# Altium PCB nail_detector.PcbDoc
Units mm, origin at the board's own origin, x right, y up, seen from the top; angles counter-clockwise.
Board outline 180 x 100 mm, 2 copper layers (Top Layer, Bottom Layer); 116 components, 102 nets, 420 pads, 177 vias.
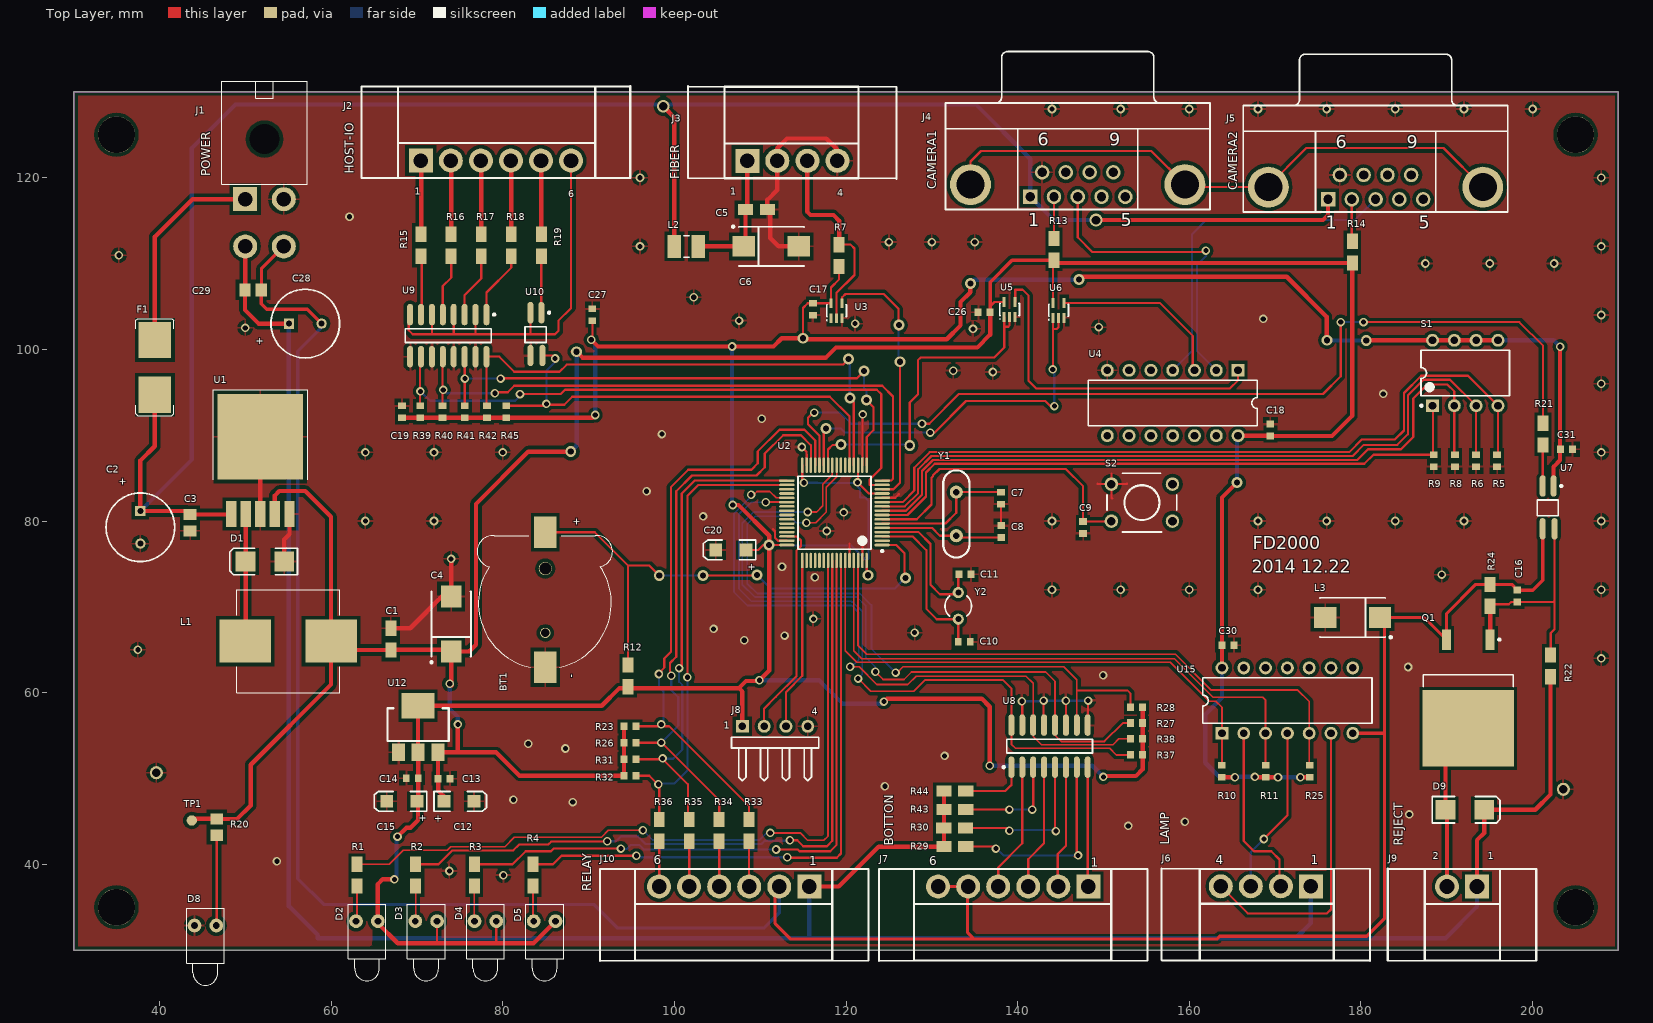
[diagram p0: Top Layer view]
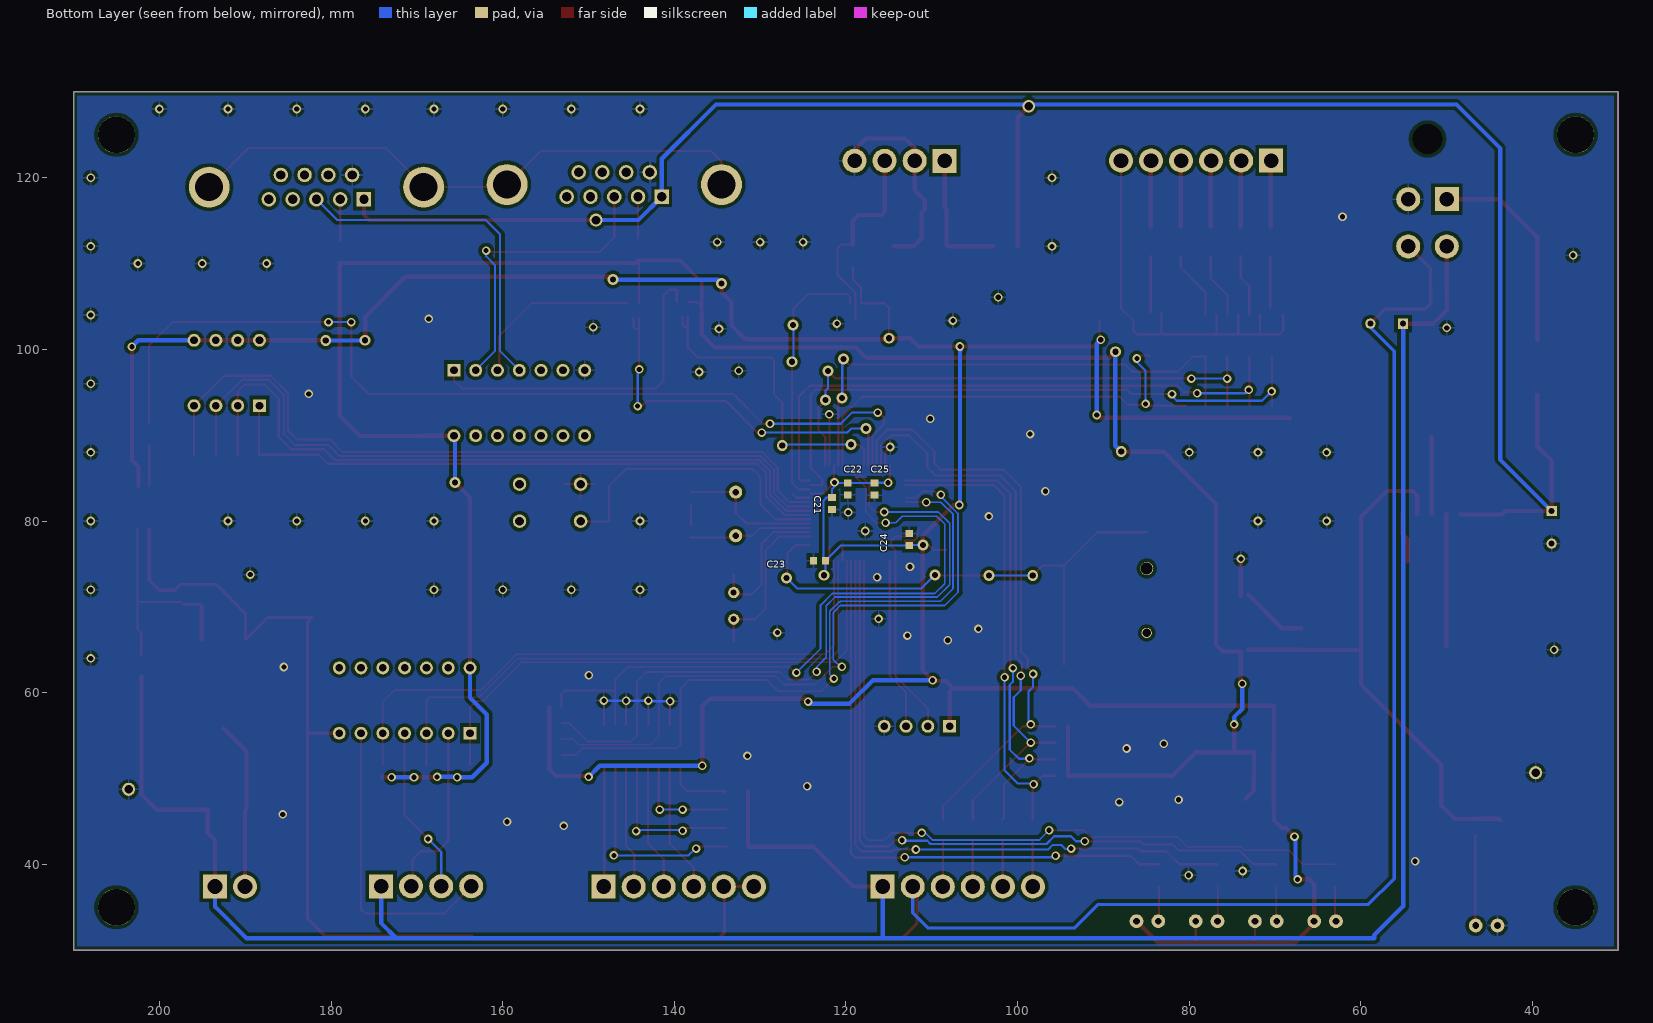
[diagram p1: Bottom Layer view, seen from below]

## Layer stack, top to bottom
Top Layer: signal copper 0.0356
Dielectric: dielectric 0.32, FR-4, Dk 4.8
Bottom Layer: signal copper 0.0356

## Board outline
30,130 210,130 210,30 30,30

## Design rules (kind name [scope] priority, off if disabled: settings)
Clearance Clearance_u2 [InComponent('U2')] p1 off: gap=0.2
Clearance Clearance_all [All] p2: gap=0.2
Clearance ploy [All] p3 off: gap=0.4
ComponentClearance [All] p1: gap=0.1 collisioncheckmode=3 verticalgap=0.254 showdistances=FALSE
HoleSize [All] p1: absolutevalues=TRUE maxlimit=5 minlimit=0.025 maxpercent=80.000 minpercent=20.000
MinimumSolderMaskSliver [All] p1 off: minsoldermaskwidth=0.254
PolygonConnect [All] p1: connectstyle=Relief reliefconductorwidth=0.254 reliefentries=4 polygonreliefangle="90 Angle"
RoutingVias [All] p1: holewidth=0.6 width=1 viastyle="Through Hole" minholewidth=0.4 minwidth=1 maxholewidth=0.711 maxwidth=1.27
SilkToSilkClearance [All] p1 off: silktosilkclearance=0.1
SilkscreenOverComponentPads [All] p1 off: minsilkscreentomaskgap=0
SolderMaskExpansion [All] p1: expansion=0.102
Width [All] p1: maxlimit=1 minlimit=0.2 preferedwidth=0.254 minimp=50.000000 maximp=50.000000 favimp=50.000000
23 further rules are at their usual default settings.

## Components (designator, comment, footprint, x,y, rotation, side; value= is the part's Value field where it differs from the comment)
BT1 "Battery" CR1220 84.963,70.46 r90 top
C1 "100nF" 0805 66.974,64.974 r90 top
C2 "35V220uF" RB8-12 37.79,79.273 r90 top
C3 "100nF" 6-0805 43.581,79.807 r270 top
C4 "Cap Pol3" 7343 74,68 r90 top
C5 "100nF" 0805 108.3,116.3 r0 top
C6 "Cap Pol3" 7343 111.3,112 r0 top
C7 "Cap" 1608[0603] 138.057,82.655 r90 top
C8 "Cap" 1608[0603] 138.083,78.769 r270 top
C9 "Cap" 1608[0603] 147.625,79.248 r90 top
C10 "Cap" 1608[0603] 133.782,65.938 r180 top
C11 "Cap" 1608[0603] 133.883,73.787 r180 top
C12 "Cap Pol3" 3216-18 74.905,47.346 r0 top
C13 "Cap Semi" 1608[0603] 73.177,49.987 r180 top
C14 "Cap Semi" 1608[0603] 69.469,50.038 r0 top
C15 "Cap Pol3" 3216-18 68.25,47.346 r180 top
C16 "Cap" 1608[0603] 198.222,71.247 r270 top
C17 "Cap Semi" 1608[0603] 116.154,104.673 r90 top
C18 "Cap Semi" 1608[0603] 169.443,90.602 r270 top
C19 "Cap Semi" 1608[0603] 68.275,92.735 r270 top
C20 "Cap Pol3" 3216-18 106.578,76.632 r180 top
C21 "Cap Semi" 1608[0603] 121.641,82.042 r90 bottom
C22 "Cap Semi" 1608[0603] 119.786,83.744 r90 bottom
C23 "Cap Semi" 1608[0603] 123.088,75.387 r180 bottom
C24 "Cap Semi" 1608[0603] 112.624,77.851 r270 bottom
C25 "Cap Semi" 1608[0603] 116.688,83.718 r90 bottom
C26 "Cap Semi" 1608[0603] 136.093,104.318 r0 top
C27 "Cap Semi" 1608[0603] 90.449,104.038 r270 top
C28 "35V220uF" RB8-12 57,103 r180 top
C29 "100nF" 6-0805 50.927,106.934 r0 top
C30 "Cap Semi" 1608[0603] 164.516,65.532 r180 top
C31 "Cap Semi" 1608[0603] 203.962,88.367 r180 top
D1 "SS24" SMB 52.293,75.286 r180 top
D2 "" LED-1 64.186,33.376 r270 top
D3 "" LED-1 71.086,33.376 r270 top
D4 "" LED-1 77.986,33.376 r270 top
D5 "" LED-1 84.887,33.376 r270 top
D8 "" LED-1 45.364,32.868 r270 top
D9 "SS24" SMB 192.1,46.355 r0 top
F1 "LITTLEFUSE154-002" LTFS154 39.472,101.092 r270 top
J1 "Header 4H" 5569-4A 50,117.5 r180 top
J2 "" 3500-6 70.46,121.996 r0 top
J3 "Header 4" 3500-4 108.5,121.971 r0 top
J4 "D Connector 9" DSUB1.385-2H9 147,128.7 r0 top
J5 "D Connector 9" DSUB1.385-2H9 181.7,128.4 r0 top
J6 "Header 4" 3500-4 174.168,37.44 r180 top
J7 "" 3500-6 148.234,37.414 r180 top
J8 "Header 4" HDR1X4H 107.925,56.083 r0 top
J9 "Header 2" 3500-2 193.523,37.414 r180 top
J10 "" 3500-6 115.722,37.414 r180 top
L1 "33uH/2.1A" CDRH1205 55,66 r90 top
L2 "Inductor" 3225[1210] 101.397,111.989 r180 top
L3 "33uH/2.1A" 7343 179.019,68.758 r180 top
Q1 "IRF530NS" D2PAK_N 192.507,59.385 r270 top
R1 "Res Semi" 0805 63.017,40.005 r270 top
R2 "Res Semi" 0805 69.858,40.005 r270 top
R3 "Res Semi" 0805 76.7,40.005 r270 top
R4 "Res Semi" 0805 83.541,40.005 r270 top
R5 "Res Semi" 1608[0603] 195.859,87.02 r90 top
R6 "Res Semi" 1608[0603] 193.404,87.02 r90 top
R7 "Res2" 0805 119.2,112.2 r270 top
R8 "Res Semi" 1608[0603] 190.949,87.02 r90 top
R9 "Res Semi" 1608[0603] 188.493,87.02 r90 top
R10 "Res Semi" 1608[0603] 163.779,50.851 r270 top
R11 "Res Semi" 1608[0603] 168.91,50.851 r270 top
R12 "Res2" 0805 94.615,60.681 r90 top
R13 "Res2" 0805 144.247,112.928 r270 top
R14 "Res2" 0805 178.994,112.598 r270 top
R15 "Res Semi" 0805 70.5,113.4 r270 top
R16 "Res Semi" 0805 74,113.4 r270 top
R17 "Res Semi" 0805 77.5,113.4 r270 top
R18 "Res Semi" 0805 81,113.4 r270 top
R19 "Res Semi" 0805 84.5,113.4 r270 top
R20 "Res Semi" 2012[0805] 46.685,44.348 r90 top
R21 "Res Semi" 0805 201.219,91.389 r270 top
R22 "Res Semi" 0805 202.082,61.849 r90 top
R23 "Res Semi" 1608[0603] 94.844,56.083 r180 top
R24 "Res Semi" 0805 195.047,70.068 r90 top
R25 "Res Semi" 1608[0603] 174.041,50.851 r270 top
R26 "Res Semi" 1608[0603] 94.844,54.161 r180 top
R27 "Res Semi" 1608[0603] 153.859,56.456 r0 top
R28 "Res Semi" 1608[0603] 153.859,58.293 r0 top
R29 "Res Semi" 0805 133.96,42.062 r180 top
R30 "Res Semi" 0805 133.934,44.221 r180 top
R31 "Res Semi" 1608[0603] 94.844,52.239 r180 top
R32 "Res Semi" 1608[0603] 94.844,50.317 r180 top
R33 "Res Semi" 0805 108.712,42.697 r90 top
R34 "Res Semi" 0805 105.224,42.697 r90 top
R35 "Res Semi" 0805 101.735,42.697 r90 top
R36 "Res Semi" 0805 98.247,42.697 r90 top
R37 "Res Semi" 1608[0603] 153.859,52.781 r0 top
R38 "Res Semi" 1608[0603] 153.859,54.618 r0 top
R39 "Res Semi" 1608[0603] 70.383,92.735 r270 top
R40 "Res Semi" 1608[0603] 72.983,92.735 r270 top
R41 "Res Semi" 1608[0603] 75.582,92.735 r270 top
R42 "Res Semi" 1608[0603] 78.181,92.735 r270 top
R43 "Res Semi" 0805 133.96,46.38 r180 top
R44 "Res Semi" 0805 133.96,48.539 r180 top
R45 "Res Semi" 1608[0603] 80.416,92.735 r270 top
S1 "SW-DIP4" DIP-8 192.147,97.245 r90 top
S2 "SW-PB" BUTTON6*6*6 150.927,84.303 r0 top
TP1 "TP" TP1 43.764,45.11 r90 top
U1 "LM2596S-5.0" TO-263 51.76,89.814 r0 top
U2 "STM32F103R6T6" LQFP64_N 118.658,80.953 r180 top
U3 "NC7SZ14P5X" SC70-5 118.9,104.5 r0 top
U4 "SN7407N" N014 158.064,93.751 r180 top
U5 "NC7S08" SC70-5 139.064,104.645 r0 top
U6 "NC7S08" SC70-5 144.764,104.545 r0 top
U7 "ps2801-1" SO-4_M 202.438,83.922 r270 top
U8 "ps2801-4" SO-16_M 143.713,53.772 r90 top
U9 "ps2801-4" SO-16_M 73.66,101.6 r270 top
U10 "ps2801-1" SO-4_M 84.506,104.115 r270 top
U12 "AS1117M3-33" SOT-223/P2.3 67.836,53.01 r0 top
U15 "SN7407N" N014 171.425,59.08 r0 top
Y1 "XTAL" XTAL-A 132.85,78.286 r90 top
Y2 "XTAL" R38 133.079,70.108 r0 top

## Footprints (in the part's own frame and the unit in brackets; to place one, negate y for a bottom-side part, rotate by r counter-clockwise, add the part's x,y. Pads: shape width x height; smd on the part's side, far side on the other; paste and mask are expansions set on the pad)
6-0805 [mm] "Chip Resistor; Body 2.0 x 1.3 mm (LxW typ)"
  rect 1.3x1.5 smd: 1(-0.95,0) 2(0.95,0)
0805 [mil]
  rect 70x50 smd: 1(0,0) 2(100,0)
1608[0603] [mm] "Chip Capacitor, Body 1.6x0.8mm, IPC High Density"
  rect 0.8x0.9 smd: 1(-0.7,0) 2(0.7,0)
  body extent -0.87,-0.48 0.87,0.48, height 1.3
2012[0805] [mm] "Chip Resistor; Body 2.0 x 1.3 mm (LxW typ)"
  rect 1.3x1.5 smd: 1(-0.95,0) 2(0.95,0)
3216-18 [mm]
  rect 1.5x1.5 smd: 1(-1.75,0) 2(1.75,0)
  silkscreen extent -2.9,-1.15 3.2,1.15, body extent -1.63,-0.8 1.57,0.8, height 1.6
3225[1210] [mm] "Chip Resistor; Body 3.2 x 2.5 mm (LxW typ)"
  rect 1.6x2.7 smd: 1(-1.4,0) 2(1.4,0)
  silkscreen extent -0.3,-1.25 0.3,1.25
3500-2 [mil]
  rect 110x110 hole 66.93: 1(0,0)
  round 110 hole 66.93: 2(137.8,0)
  silkscreen extent -272,-82 409,340, body extent -272,-80 409,341, height 315
3500-4 [mil]
  rect 110x110 hole 66.93: 1(0,0)
  round 110 hole 66.93: 2(137.79,0) 3(275.59,0) 4(413.39,0)
  silkscreen extent -272,-82 685,342, body extent -272,-80 685,331, height 315
3500-6 [mil]
  rect 110x110 hole 66.93: 1(0,0)
  round 110 hole 66.93: 2(137.8,0) 3(275.59,0) 4(413.39,0) 5(551.18,0) 6(688.98,0)
  silkscreen extent -272,-80 961,341, body extent -272,-80 961,330, height 315
5569-4A [mil] "MOLEX 5569-4A"
  round 60 hole 137.8 unplated: 0(-88.58,-275.59)
  rect 110x110 hole 66.93: 1(0,0)
  round 110 hole 66.93: 2(-177.17,0) 3(0,216.54) 4(-177.17,216.54)
  silkscreen extent -285,-541 108,-69
7343 [mm] "Capacitor, SM Tantalum; Body 7.3 x 4.3 mm (LxW typ)"
  rect 2.6x2.4 smd: 1(-3.2,0) 2(3.2,0)
  silkscreen extent -4.57,-2.3 3.8,2.42
BUTTON6*6*6 [mil]
  round 62 hole 39.37: 1(0,0) 2(0,-170) 3(280,-170) 4(280,0)
  silkscreen extent -20,-220 300,50, body extent -13,-208 299,36, height 276
CDRH1205 [mm]
  rect 5x6 smd: 1(0,5) 2(0,-5)
  silkscreen extent -6,-6 6,6, body extent -6.02,-5.94 5.93,6.03, height 6
CR1220 [mm] "battery cr1220"
  round 1.2 hole 1: 0(-3.5,0)
  round 1.524 hole 1.4: 0(4,0)
  rect 3.7x2.6 smd: 1(8.23,0) 2(-7.5,0)
  silkscreen extent -7.51,-7.83 7.83,7.93
D2PAK_N [mm] "D2-PAK, 4-Leads, Body 8.8x10.4mm, Pitch 2.54mm, Lead Span 15.1mm, IPC Medium Density"
  rect 2.4x1.05 smd: 1(-6.8,2.54) 3(-6.8,-2.54)
  rect 8.9x10.65 smd: 2(3.55,0)
  silkscreen extent -6.92,-5.25 -1.3,5.25, body extent -2.7,-5.28 6.3,5.28, height 4.69
DIP-8 [mm] "DIP; 8 Leads; Row Spacing 7.62 mm; Pitch 2.54 mm"
  rect 1.5x1.5 hole 0.9: 1(-3.81,3.81)
  round 1.5 hole 0.9: 2(-3.81,1.27) 3(-3.81,-1.27) 4(-3.81,-3.81) 5(3.81,-3.81) 6(3.81,-1.27) 7(3.81,1.27) 8(3.81,3.81)
  silkscreen extent -3.93,-5.15 2.65,5.23, body extent -3.6,-5.15 3.6,5.15, height 5.08
DSUB1.385-2H9 [mm] "Connector; D Subminiature; 9 Position; Right Angle; Pitch 1.385 mm"
  rect 1.69x1.69 hole 1.09: 1(-5.54,-10.92)
  round 1.69 hole 1.09: 2(-2.77,-10.92) 3(0,-10.92) 4(2.77,-10.92) 5(5.54,-10.92) 6(-4.155,-8.08) 7(-1.385,-8.08) 8(1.385,-8.08) 9(4.155,-8.08)
  round 4.76 hole 3.26: 10(-12.495,-9.5) 11(12.495,-9.5)
  silkscreen extent -15.4,-12.4 15.4,6
HDR1X4H [mm] "Connector; Header; 4 Position; Right Angle"
  rect 1.5x1.5 hole 0.9: 1(0,0)
  round 1.5 hole 0.9: 2(2.54,0) 3(5.08,0) 4(7.62,0)
  silkscreen extent -1.27,-6.35 8.89,-1.27
LED-1 [mm] "LED; 2 Leads"
  round 1.6 hole 0.8: 1(0,1.27) 2(0,-1.27)
  silkscreen extent -2,-2.2 6.95,2.2
LQFP64_N [mm] "Thin QFP, 64-Leads, Body 10x10mm, Pitch 0.5mm, IPC Medium Density"
  oval 1.8x0.3 smd: 1(-5.55,3.75) 2(-5.55,3.25) 3(-5.55,2.75) 4(-5.55,2.25) 5(-5.55,1.75) 6(-5.55,1.25) 7(-5.55,0.75) 8(-5.55,0.25) 9(-5.55,-0.25) 10(-5.55,-0.75) 11(-5.55,-1.25) 12(-5.55,-1.75) 13(-5.55,-2.25) 14(-5.55,-2.75) 15(-5.55,-3.25) 16(-5.55,-3.75) 33(5.55,-3.75) 34(5.55,-3.25) 35(5.55,-2.75) 36(5.55,-2.25) 37(5.55,-1.75) 38(5.55,-1.25) 39(5.55,-0.75) 40(5.55,-0.25) 41(5.55,0.25) 42(5.55,0.75) 43(5.55,1.25) 44(5.55,1.75) 45(5.55,2.25) 46(5.55,2.75) 47(5.55,3.25) 48(5.55,3.75)
  oval 0.3x1.8 smd: 17(-3.75,-5.55) 18(-3.25,-5.55) 19(-2.75,-5.55) 20(-2.25,-5.55) 21(-1.75,-5.55) 22(-1.25,-5.55) 23(-0.75,-5.55) 24(-0.25,-5.55) 25(0.25,-5.55) 26(0.75,-5.55) 27(1.25,-5.55) 28(1.75,-5.55) 29(2.25,-5.55) 30(2.75,-5.55) 31(3.25,-5.55) 32(3.75,-5.55) 49(3.75,5.55) 50(3.25,5.55) 51(2.75,5.55) 52(2.25,5.55) 53(1.75,5.55) 54(1.25,5.55) 55(0.75,5.55) 56(0.25,5.55) 57(-0.25,5.55) 58(-0.75,5.55) 59(-1.25,5.55) 60(-1.75,5.55) 61(-2.25,5.55) 62(-2.75,5.55) 63(-3.25,5.55) 64(-3.75,5.55)
  silkscreen extent -5.68,-4.25 4.25,4.57, body extent -5,-5 5,5, height 1.6
LTFS154 [mm] "little fuse 154"
  rect 4.24x3.81 smd: 1(0,0) 2(6.37,0)
  silkscreen extent -2.5,-2.2 8.8,2.2
N014 [mm] "DIP; 14 Leads; Row Spacing 7.62 mm; Pitch 2.54 mm"
  rect 1.5x1.5 hole 0.9: 1(-7.62,-3.81)
  round 1.5 hole 0.9: 2(-5.08,-3.81) 3(-2.54,-3.81) 4(0,-3.81) 5(2.54,-3.81) 6(5.08,-3.81) 7(7.62,-3.81) 8(7.62,3.81) 9(5.08,3.81) 10(2.54,3.81) 11(0,3.81) 12(-2.54,3.81) 13(-5.08,3.81) 14(-7.62,3.81)
  silkscreen extent -9.85,-2.65 9.85,2.65
R38 [mm] "Crystal, Thru-Hole; 2 Leads; Body 3.1 x 8.2 mm (Dia.xH)"
  round 1.3 hole 0.7: 1(0,1.55) 2(0,-1.55)
  silkscreen extent -1.55,-1.19 1.55,1.17
RB8-12 [mm] "Polarized Capacitor (Radial); 2 Leads,D=8,H=12"
  rect 1.2x1.2 hole 0.7: 1(1.905,0)
  round 1.2 hole 0.7: 2(-1.905,0)
  silkscreen extent -4,-4 4,4, body extent -3.9,-3.94 4.06,4.05, height 8
SC70-5 [mm] "SOT-353/SC-88A; 5 Leads; Body 2.2 x 2.4 mm, inc. leads (LxW max)"
  rect 0.35x1.15 smd: 1(-0.65,-0.875) 2(0,-0.875) 3(0.65,-0.875) 4(0.65,0.875) 5(-0.65,0.875)
  silkscreen extent -1.17,-1.15 1.15,0.7, body extent -1,-1.1 1,1.1, height 0.49
SMB [mm] "DO-214-AA/SMB; 2 C-Bend Leads; Body 5.3 x 3.6 mm, inc. leads (LxW)"
  rect 2.3x2.3 smd: 1(-2.25,0) 2(2.25,0)
  silkscreen extent -3.8,-1.55 4.1,1.55
SO-4_M [mm] "SOIC, 16-Leads, Body 9.9x3.9mm, Pitch 1.27mm, IPC Low Density"
  oval 2.5x0.7 smd: 1(-0.164,0) 2(-0.164,-1.27) 3(4.826,-1.27) 4(4.826,0.127)
  silkscreen extent -0.29,-1.9 3.3,1.03
SO-16_M [mm] "SOIC, 16-Leads, Body 9.9x3.9mm, Pitch 1.27mm, IPC Low Density"
  oval 2.5x0.7 smd: 1(-2.45,4.445) 2(-2.45,3.175) 3(-2.45,1.905) 4(-2.45,0.635) 5(-2.45,-0.635) 6(-2.45,-1.905) 7(-2.45,-3.175) 8(-2.45,-4.445) 9(2.45,-4.445) 10(2.45,-3.175) 11(2.45,-1.905) 12(2.45,-0.635) 13(2.45,0.635) 14(2.45,1.905) 15(2.45,3.175) 16(2.45,4.445)
  silkscreen extent -2.57,-5 0.8,5.47, body extent -2,-5 2,5, height 1.75
SOT-223/P2.3 [mil]
  rect 59x79 smd: 1(0.61,1.72) 2(91.16,1.72) 3(181.71,1.72)
  rect 150x119 smd: 4(90.49,215.26)
  silkscreen extent -49,54 231,204
TO-263 [mm]
  rect 1.2x3 smd: 1(-3.4,-9) 2(-1.7,-9) 3(0,-9) 4(1.7,-9) 5(3.4,-9)
  rect 10x10 smd: 6(0,0)
  silkscreen extent -5.5,-5.02 5.5,5.5, body extent -5.49,-5.84 5.31,5.21, height 4
TP1 [mm]
  round 1.2 smd: 1(0,-0.02)
XTAL-A [mil]
  round 60 hole 30: 1(0,0) 2(200,0)
  silkscreen extent -100,-60 300,60, body extent -115,-95 325,89, height 143

## Part data
BT1: "Multicell Battery"
C1 C3 C5 C29: library part CAP
C2 C28: library part "CAPACITOR POL", "Polarized Capacitor (Radial); 35V;220uF;D=8,H=12"
C4 C6: "Polarized Capacitor (Surface Mount);220uF;16V;7343"
C7 C8 C9 C10 C11 C16: "Capacitor"
C12 C15 C20: "Polarized Capacitor (Surface Mount)"
C13 C14 C17 C18 C19 C21 C22 C23 C24 C25 C26 C27 C30 C31: "Capacitor (Semiconductor SIM Model)"
D1 D9: library part "D Schottky", "Schottky Diode; SS24; 40V;2A;SMB"
D2 D3 D4 D5 D8: library part LED1, "Typical RED GaAs LED"
F1: library part "Fuse 1", "Fuse"
J1: "Header, 4-Pin, Right Angle"
J2 J7 J10: library part "Header 6", "Header, 6-Pin"
J3 J6 J8: "Header, 4-Pin"
J4 J5: "Receptacle Assembly, 9 Position, Right Angle"
J9: "Header, 2-Pin"
L1 L3: library part L, "CDRH1205-330M；大功率屏蔽贴片"
Q1: "HEXFET Power MOSFET"
R1 R2 R3 R4 R5 R6 R8 R9 R10 R11 R15 R16 R17 R18 R19 R20 R21 R22 R23 R24 R25 R26 R27 R28 R29 R30 R31 R32 R33 R34 R35 R36 R37 R38 R39 R40 R41 R42 R43 R44 R45: "Semiconductor Resistor"
R7 R12 R13 R14: "Resistor"
S1: "DIP Switch"
S2: "Switch"
TP1: "Test Point"
U1: "Buck regulator; 5.0V;3A; TO-263;TI"
U2: "STM32 ARM-based 32-bit MCU with 32 Kbytes Flash, 64-pin LQFP, Industrial Temperature"
U3: library part NC7SZ14
U4 U15: "Hex Buffer / Driver with Open-Collector High-Voltage Outputs"
U12: library part AS1117-50
Y1 Y2: "Crystal Oscillator"

## Free pads (board coordinates)
  round 4.3 hole 4.3 unplated: 0(35,125) 1(35,35) 2(205,35) 3(205,125)
  round 1.524 hole 1: 0(39.649,50.673) 1(203.581,48.743)

## Via types
v1: diameter 1, hole 0.6, Top Layer to Bottom Layer, 152 vias
v2: diameter 1.27, hole 0.711, Top Layer to Bottom Layer, 23 vias
v3: diameter 1.5, hole 1, Top Layer to Bottom Layer, 2 vias

## Nets (pads, with @x,y where several pads share a name; then routed paths per layer and width w, separated by ;. In a path a pad name is that pad's centre, name@x,y a point inside that pad or via, vN(x,y) a via of type N, cw(c..) or ccw(c..) an arc to the next point about the centre after c; other vN are vias at no path point)
24GND: C16.1 C28.2 C29.2 J1.4 J7.5 J7.6 J10.2 L3.1 Q1.3 R24.2 U7.3 U15.7 | length 301.3
  Top Layer w0.381: J1.4 51.892,109.392 51.892,106.949 C29.2 51.877,105.324 52.527,104.673 57.232,104.673 C28.2 ; J10.2 111.735,36.926 111.735,33.096 113.538,31.293 134.925,31.293 ; J7.6 J7.5 134.163,37.343 134.163,32.055 134.925,31.293 ; U15.7 182.575,55.27 182.753,55.093 ; U7.3 201.168,73.101 200.014,71.947 C16.1 197.561,72.608 R24.2 193.385,72.608 189.967,69.19 Q1.3 187.394,68.758 L3.1 182.753,68.224 182.753,55.093 ; 134.925,31.293 163.22,31.293 163.551,31.623 180.67,31.623 182.753,33.706 182.753,55.093
  Bottom Layer w0.381: C28.2 58.905,102.568 56.134,99.797 56.134,38.329 59.131,35.331 90.602,35.331 93.345,32.588 110.465,32.588 112.222,34.346 J10.2
+3.3V: C14.2 C15.1 C17.2 C19.2 C20.1 C21.2 C22.2 C23.2 C24.2 C25.2 C27.2 C31.2 D2.1 D3.1 D4.1 D5.1 J8.1 R7.2 R12.1 R27.2 R28.2 R37.2 R38.2 R39.2 R40.2 R41.2 R42.2 R45.2 S1.5 S1.6 S1.7 S1.8 U2.13 U2.19 U2.32 U2.48 U2.64 U3.5 U7.1 U12.2 U12.4 | length 435.2
  Top Layer w0.254: 72.356,31.115 D3.1 ; 79.256,30.912 D4.1 ; v1@90.449,100.99 C27.2 ; C20.1 109.779,76.632 110.363,77.216 v2(111.049,77.216) 111.061,77.203 U2.48 ; U2.32 114.908,84.634 v1(115.087,84.455) ; v2@114.986,101.194 v2(114.986,101.295) 114.986,104.826 115.533,105.373 C17.2 U3.5@118.248,105.373 ; U3.5 118.25,107.201 119.2,108.151 R7.2 ; U2.19 121.408,84.578 v1(121.336,84.506) 122.638,83.203 U2.13 ; U2.64 122.408,73.832 v2(122.555,73.685)
  Top Layer w0.5: v1(67.386,38.252) 66.015,38.252 65.456,37.694 D2.1 65.456,33.122 67.767,30.81 83.591,30.81 D5.1 ; v1(67.742,43.231) 68.783,44.272 69.263,44.272 70.127,45.136 70.127,46.99 70.169,47.032 C14.2 70.169,53.037 U12.2 70.135,53.071 U12.4 91.549,58.478 93.599,60.528 107.518,60.528 ; C19.2 R39.2 R40.2 R41.2 R42.2 R45.2@80.34,92.035 ; R45.2 90.461,92.035 v1(90.78,92.354) ; v1(90.322,101.117) 90.449,100.99 91.11,100.33 v1(106.731,100.33) 111.557,100.33 112.522,101.295 v2(114.986,101.295) 115.106,101.175 131.732,101.175 133.35,102.794 133.35,105.512 134.493,106.655 v2(134.493,107.671) ; v1(106.807,81.864) 107.467,81.864 111.049,78.283 v2(111.049,77.216) 111.049,62.586 v1(109.906,61.443) 110.211,61.443 110.134,61.366 108.356,61.366 107.518,60.528 ; J8.1 107.925,60.122 107.518,60.528 ; v1(124.409,58.953) 124.765,59.309 135.814,59.309 136.754,58.369 v1(136.754,51.486) ; v2(147.142,108.153) 147.447,108.458 171.348,108.458 176.022,103.784 v2(176.022,101.067) ; v1(149.987,50.19) 150.089,50.292 153.772,50.292 154.559,51.079 R37.2 R38.2 R27.2 R28.2 ; v2(180.619,101.041) 180.633,101.055 S1.8 S1.7 S1.6 S1.5 ; U7.1 202.438,86.309 203.2,87.071 v1(203.2,100.305)
  Bottom Layer w0.254: v2(111.049,77.216) 112.559,77.216 C24.2 120.625,77.151 C23.2 ; v1(115.087,84.455) C25.2@116.651,84.455 ; C25.2 C22.2@119.761,84.418 ; C22.2 v1@121.274,84.444 ; v1(121.336,84.506) 121.336,84.023 121.641,83.718 C21.2 122.261,82.742 122.606,82.398 122.606,75.605 C23.2 ; v2(122.555,73.685) 122.388,73.852 C23.2
  Bottom Layer w0.5: v1(67.386,38.252) 67.64,38.506 67.64,43.129 v1(67.742,43.231) ; v1(90.322,101.117) 90.78,100.66 v1(90.78,92.354) ; v1@106.604,99.949 106.604,99.924 106.716,99.811 106.716,81.955 v1(106.807,81.864) ; v1(109.906,61.443) 116.865,61.443 119.583,58.725 124.181,58.725 v1(124.409,58.953) ; v2(134.493,107.671) 134.925,108.102 147.091,108.102 v2(147.142,108.153) ; v1(136.754,51.486) 148.692,51.486 v1(149.987,50.19) ; v2(176.022,101.067) 176.047,101.041 v2(180.619,101.041) ; S1.5 202.45,101.055 v1(203.2,100.305)
+5V: C1.1 C4.1 C12.1 C13.2 C18.2 C26.2 C30.2 L1.2 R10.2 R11.2 R13.2 R14.2 R20.2 R23.2 R25.2 R26.2 R31.2 R32.2 TP1.1 U1.4 U4.14 U5.5 U6.5 U12.3 U15.14 | length 356.2
  Top Layer w0.254: 136.793,102.325 136.855,102.387 136.855,105.063 137.312,105.52 U5.5 ; U6.5 144.114,110.255 R13.2
  Top Layer w0.3: v2@88.062,99.72 v2(88.621,99.72)
  Top Layer w0.4: C26.2 136.793,107.837 139.344,110.388 R13.2
  Top Layer w0.5: TP1.1@43.764,45.11 43.952,45.298 R20.2 ; R20.2@46.05,45.273 49.058,45.273 50.648,46.863 50.648,51.613 60,60.965 L1.2 59.985,65.985 59.985,80.496 56.992,83.49 53.969,83.49 53.46,82.98 U1.4 ; L1.2@60.468,64.974 C1.1 67,65 C4.1@73.121,65 ; C12.1@73.453,47.644 72.477,48.619 C13.2 72.452,50.013 U12.3 74.6,53.054 ; v1(73.838,61.036) 74.016,60.858 74.092,60.858 74,60.95 C4.1 76.179,64.8 76.179,64.876 76.886,65.583 76.886,81.991 82.982,88.087 v2(87.935,88.087) ; v1(74.778,56.312) 74.778,53.232 74.6,53.054 ; v2(88.621,99.72) 89.306,99.035 117.653,99.035 118.847,100.228 135.306,100.228 136.793,101.716 136.793,102.325 C26.2 ; R23.2 R26.2 R31.2 R32.2 81.966,50.317 79.229,53.054 74.6,53.054 ; R13.2@144.311,110.058 R14.2 178.994,92.278 176.617,89.902 C18.2 169.404,89.941 U4.14 ; R10.2 163.79,50.14 v1(165.303,50.14) ; U15.14 163.805,65.521 C30.2 163.816,82.739 v2(165.557,84.48) ; v1(167.64,50.19) 167.68,50.151 R11.2 168.921,50.14 v1(170.332,50.14) ; v1(172.949,50.14) 172.96,50.151 R25.2
  Bottom Layer w0.5: v1(73.838,61.036) 73.838,58.09 74.778,57.15 v1(74.778,56.312) ; v2(87.935,88.087) 88.621,88.773 v2(88.621,99.72) ; 162.865,58.42 162.814,58.42 ; U15.14 163.805,59.411 162.814,58.42 ; v2(165.557,84.48) 165.557,89.814 U4.14 ; v1(167.64,50.19) 165.532,50.19 165.43,50.089 165.354,50.089 v1(165.303,50.14) 163.551,50.14 161.849,51.841 161.849,57.455 162.814,58.42 ; v1(170.332,50.14) v1(172.949,50.14)
+12V: C2.1 C3.1 F1.2 J4.1 J5.1 L2.2 U1.1 | length 231.3
  Top Layer w0.5: F1.2 39.472,88.722 37.79,87.04 C2.1 43.159,81.178 C3.1 48.302,80.757 U1.1 ; v3(98.704,128.321) 99.997,127.028 L2.2 ; v3(149.123,115.062) 175.565,115.062 176.16,115.657 J5.1
  Bottom Layer w0.5: C2.1 43.79,87.178 43.79,123.444 48.87,128.524 135.153,128.524 141.46,122.217 J4.1 144.178,115.062 v3(149.123,115.062)
+12VIN: F1.1 J1.1 | length 25.4
  Top Layer w0.5: F1.1 39.472,113.106 43.865,117.5 J1.1
  Bottom Layer w0.5: J1.1@48.92,117.5 J1.1
+24V: C28.1 C29.1 D9.2 J1.3 J6.1 J9.1 J10.1 R22.1 R29.2 R30.2 R43.2 R44.2 | length 293.5
  Top Layer w0.508: J1.3 50,106.957 C29.1 49.977,104.582 51.559,103 C28.1 ; J10.1 119.151,37.414 123.8,42.062 R29.2 R43.2 R44.2 ; J9.1 193.523,42.824 194.35,43.652 D9.2 200.304,46.355 202.082,48.133 R22.1
  Bottom Layer w0.508: C28.1 55.095,35.126 58.471,31.75 58.471,31.394 115.621,31.394 ; J10.1 115.722,31.496 115.621,31.394 ; J6.1 174.168,33.172 172.39,31.394 ; J9.1 193.523,35.077 189.84,31.394 172.39,31.394 ; 115.621,31.394 172.39,31.394
EARTH: J4.10 J4.11 J5.10 J5.11 | length 68.4
  Top Layer w0.254: J4.10 134.505,121.881 135.738,123.114 155.581,123.114 J4.11 159.795,118.9 169.065,118.9 173.634,123.469 189.626,123.469 J5.11
GND: BT1.2 C1.2 C2.2 C3.2 C4.2 C5.2 C6.2 C7.1 C8.1 C9.1 C10.1 C11.1 C12.2 C13.1 C14.1 C15.2 C17.1 C18.1 C19.1 C20.2 C21.1 C22.1 C23.1 C24.1 C25.1 C26.1 C27.1 C30.1 C31.1 D1.1 D8.2 J1.2 J3.2 J3.4 J4.6 J5.6 J8.4 L3.2 pad.0@39.649,50.673 pad.1@203.581,48.743 R5.1 R6.1 R8.1 R9.1 S2.1 U1.3 U1.5 U1.6 U2.12 U2.18 U2.31 U2.47 U2.60 U2.63 U3.3 U4.7 U5.3 U6.3 U8.9 U8.11 U8.13 U8.15 U9.9 U9.11 U9.13 U9.15 U10.3 U12.1 | length 97
  Top Layer w0.254: 111.506,79.045 111.735,78.816 111.735,78.054 112.085,77.703 U2.47 U2.47@113.085,77.726 ; v1(114.859,88.621) 115.408,88.071 U2.31 115.431,86.526 115.431,87.73 ; U2.60 120.408,77.381 ; U2.63 121.908,76.999 ; U2.18 121.908,92.394 v1(121.945,92.431) ; U2.12 125.731,82.703 126.136,83.109 ; C8.1@138.057,79.494 C7.1 ; v1(140.487,59.004) 140.538,58.953 U8.15 ; v1(143.027,59.08) 143.027,56.273 U8.13 ; U8.11 v1(145.618,59.055) ; U8.9 148.209,56.273 v1(148.209,59.08) ; 149.301,84.353 149.352,84.303 S2.1 ; 150.927,85.5 S2.1 ; 151.028,82.626 150.927,82.728 S2.1 ; 152.73,84.353 152.679,84.303 S2.1
  Top Layer w0.5: U1.3 U1.6 ; D1.1 54.543,77.84 55.16,78.457 U1.5 ; C1.2 69.235,67.514 C4.2@73.121,71.4 ; v1(73.99,75.59) 74,75.581 C4.2 ; C6.2 112.155,112 111.176,112.979 111.176,115.964 C5.2 110.84,117.419 112,118.579 J3.2 112,123.43 113.132,124.562 117.704,124.562 119,123.265 J3.4
  Bottom Layer w0.254: v1(140.487,59.004) 142.951,59.004 v1(143.027,59.08) 143.053,59.055 v1(145.618,59.055) 147.777,59.055 v1@148.184,59.461
  other v1: 80.089,38.728 73.789,39.228 53.696,40.361 152.883,44.475 159.487,44.958 185.623,45.822 88.163,47.244 81.255,47.523 124.536,49.098 131.496,52.629 87.3,53.492 82.982,54.051 149.962,62.027 185.496,62.992 208,64 37.5,65 108.153,66.116 112.852,66.65 128,67 104.572,67.437 116.2,68.6 144,72 152,72 160,72 168,72 208,72 116.383,73.457 189.41,73.753 112.547,74.676 117.754,78.842 64,80 72,80 144,80 168,80 176,80 184,80 192,80 208,80 103.353,80.543 119.736,81.001 96.774,83.464 64,88 72,88 80,88 208,88 98.552,90.119 110.185,91.923 182.601,94.818 208,96 137.109,97.358 132.5,97.5 134.798,102.387 50,102.5 149.454,102.591 121.056,102.997 107.544,103.353 168.605,103.556 208,104 102.26,106.07 187.5,110 195,110 202.5,110 35.281,110.973 96,112 208,112 125,112.5 130,112.5 135,112.5 62.154,115.443 96,120 208,120 144,128 152,128 160,128 168,128 176,128 184,128 192,128 200,128
GND_IO: J2.6 U9.2 U9.4 U9.6 U9.8 U10.2 | length 49.6
  Top Layer w0.254: U9.8 69.063,103.898 69.063,102.21 69.52,101.752 71.73,101.752 ; U9.6 71.755,101.778 71.73,101.752 ; U9.4 74.295,101.752 ; U9.2 76.835,101.803 76.886,101.752 ; U10.2 83.236,101.803 83.185,101.752 ; J2.6 87.96,104.803 86.489,103.332 86.489,102.135 86.106,101.752 83.185,101.752 ; 71.73,101.752 74.295,101.752 ; 74.295,101.752 76.886,101.752 ; 76.886,101.752 83.185,101.752
GREEN: R11.1 U2.61 U15.3 | length 68.5
  Top Layer w0.203: U2.61 120.908,64.893 121.844,63.957 158.267,63.957 162.763,59.461 168.554,59.461 168.885,59.131 U15.3 168.885,51.576 R11.1
MOTO_START: R23.1 R33.2 U2.29 | length 71.1
  Top Layer w0.254: R23.1 99.39,56.083 108.712,46.761 R33.2 ; v1(98.196,62.179) 98.374,62.179 98.476,62.281 98.476,62.56 98.831,62.916 98.831,63.983 99.593,64.745 99.593,83.947 101.625,85.979 108.991,85.979 109.728,86.716 109.728,88.113 112.243,90.627 115.164,90.627 116.408,89.382 U2.29
  Bottom Layer w0.254: v1(98.196,62.179) 98.196,60.681 98.73,60.147 98.73,56.464 98.527,56.261 v1(98.476,56.312)
NetBT1_1: BT1.1 R12.2 U2.1 | length 62.7
  Top Layer w0.254: BT1.1 90.728,78.69 94.615,74.803 ; R12.2 94.615,74.803 ; v2(98.247,73.66) 97.104,74.803 94.615,74.803 ; v2(103.327,73.66) 109.601,73.66 v2(109.652,73.711) ; U2.1 125.87,77.203 126.822,76.251 126.822,73.482 v2(126.924,73.381)
  Bottom Layer w0.254: v2(98.247,73.66) v2(103.327,73.66) ; v2(109.652,73.711) 111.227,72.136 125.679,72.136 v2(126.924,73.381)
NetC5_1: C5.1 C6.1 J3.1 L2.1 | length 14.2
  Top Layer w0.5: L2.1@102.808,112 C6.1 108.3,112.2 C5.1 108.5,116.5 J3.1@108.5,120.7
NetC7_2: C7.2 U2.6 Y1.2 | length 16.7
  Top Layer w0.254: U2.6@124.231,79.703 131.596,79.703 132.85,80.958 Y1.2 C7.2@138.046,83.366
NetC8_2: C8.2 U2.5 Y1.1 | length 14
  Top Layer w0.254: U2.5 130.016,79.203 130.933,78.286 Y1.1 ; Y1.1@133.068,78.069 C8.2
NetC9_2: C9.2 S2.2 U2.7 | length 36
  Top Layer w0.254: U2.7 128.26,80.203 129.972,81.915 129.972,85.039 130.124,85.192 130.124,85.293 130.886,86.055 145.618,86.055 147.625,84.049 C9.2 150.89,79.948 S2.2
NetC16_2: C16.2 Q1.1 R22.2 R24.1 U7.4 | length 26.6
  Top Layer w0.254: R24.1 195.275,70.296 197.22,70.296 197.471,70.547 C16.2 202.373,70.547 202.565,70.739 ; R22.2 202.108,64.414 202.108,66.954 202.565,67.412 202.565,70.739 ; U7.4 202.565,70.739
  Top Layer w0.5: Q1.1 R24.1
NetD1_2: D1.2 L1.1 U1.2 | length 15.4
  Top Layer w0.5: L1.1@49.985,65.405 50.06,65.479 U1.2
NetD2_2: D2.2 R1.2 | length 4.1
  Top Layer w0.203: D2.2 63.017,33.477 R1.2
NetD3_2: D3.2 R2.2 | length 4.1
  Top Layer w0.203: D3.2 69.858,33.418 R2.2
NetD4_2: D4.2 R3.2 | length 4.1
  Top Layer w0.203: R3.2 76.7,33.393 D4.2
NetD5_2: D5.2 R4.2 | length 4.1
  Top Layer w0.203: R4.2 83.541,33.452 D5.2
NetD8_1: D8.1 R20.1 | length 10.6
  Top Layer w0.254: D8.1 46.685,32.918 R20.1
NetD9_1: D9.1 J9.2 Q1.2 | length 19.6
  Top Layer w0.5: J9.2 190.023,46.183 D9.1 189.85,53.179 Q1.2
NetJ2_1: J2.1 R15.1 | length 6.6
  Top Layer w0.5: 70.5,114.3 J2.1@70.5,120.9
NetJ2_2: J2.2 R16.1 | length 6.6
  Top Layer w0.5: 74,114.3 J2.2@74,120.9
NetJ2_3: J2.3 R17.1 | length 6.6
  Top Layer w0.5: 77.5,114.3 J2.3@77.5,120.9
NetJ2_4: J2.4 R18.1 | length 6.6
  Top Layer w0.5: 81,114.3 J2.4@81,120.9
NetJ2_5: J2.5 R19.1 | length 6.6
  Top Layer w0.5: 84.5,114.3 J2.5@84.5,120.9
NetJ6_2: J6.2 U15.2 | length 20.8
  Top Layer w0.254: U15.2 166.345,42.723 167.538,41.529 169.545,41.529 170.51,40.564 170.51,37.597 J6.2
NetJ6_3: J6.3 U15.4 | length 19.6
  Top Layer w0.254: v1(168.681,42.951) 171.425,45.695 U15.4 U15.4@171.399,55.245
  Bottom Layer w0.254: J6.3 167.168,41.438 v1(168.681,42.951)
NetJ6_4: J6.4 U15.6 | length 34.9
  Top Layer w0.254: J6.4 166.817,34.29 176.047,34.29 176.505,34.747 U15.6
NetJ7_1: J7.1 U8.8 | length 13.9
  Top Layer w0.254: U8.8 148.158,37.49 J7.1
NetJ7_2: J7.2 U8.6 | length 14.3
  Top Layer w0.254: J7.2 144.678,37.47 144.678,41.199 145.618,42.139 U8.6
NetJ7_3: J7.3 U8.4 | length 14.7
  Top Layer w0.254: J7.3 141.234,40.6 143.078,42.443 U8.4
NetJ7_4: J7.4 U8.2 | length 15.1
  Top Layer w0.254: J7.4 137.734,39.64 140.538,42.443 U8.2
NetJ10_3: J10.3 R33.1 | length 5.3
  Top Layer w0.254: R33.1 108.712,37.425 J10.3
NetJ10_4: J10.4 R34.1 | length 5.3
  Top Layer w0.254: J10.4 105.224,37.416 R34.1
NetJ10_5: J10.5 R35.1 | length 5.3
  Top Layer w0.254: J10.5 101.735,37.427 R35.1
NetJ10_6: J10.6 R36.1 | length 5.3
  Top Layer w0.254: J10.6 98.247,37.439 R36.1
NetR15_2: R15.2 U9.7 | length 6
  Top Layer w0.254: R15.2 70.566,110.794 U9.7@70.566,104.884
NetR16_2: R16.2 U9.5 | length 7.2
  Top Layer w0.254: U9.5 73.025,107.381 74,108.356 R16.2
NetR17_2: R17.2 U9.3 | length 9.3
  Top Layer w0.254: U9.3 75.565,106.324 77.5,108.259 R17.2 77.5,109.139
NetR18_2: R18.2 U9.1 | length 8
  Top Layer w0.254: U9.1 78.105,106.629 81,109.524 R18.2
NetR19_2: R19.2 U10.1 | length 6.6
  Top Layer w0.254: U10.1@84.5,104.279 R19.2
NetR21_2: R21.2 U7.2 | length 4.8
  Top Layer w0.254: U7.2 201.168,88.798 R21.2
NetR29_1: R29.1 U8.7 | length 24.4
  Top Layer w0.254: R29.1 137.236,42.062 v1(137.465,41.834) ; U8.7 146.888,41.148 146.66,40.919 146.914,40.919 v1(147.041,41.046)
  Bottom Layer w0.254: v1(137.465,41.834) 137.566,41.834 138.354,41.046 v1(147.041,41.046)
NetR30_1: R30.1 U8.5 | length 18.4
  Top Layer w0.254: R30.1 138.735,44.221 v1(139.04,43.917) ; U8.5 144.348,43.967 v1(144.45,43.866)
  Bottom Layer w0.254: v1(139.04,43.917) 138.963,43.993 144.323,43.993 v1(144.45,43.866)
NetR43_1: R43.1 U8.3 | length 12.7
  Top Layer w0.254: R43.1 v1(139.04,46.38) ; v1(141.707,46.38) 141.808,46.482 U8.3
  Bottom Layer w0.254: v1(139.04,46.38) v1(141.707,46.38)
NetR44_1: R44.1 U8.1 | length 8.1
  Top Layer w0.254: R44.1@134.188,48.311 R44.1 138.557,48.539 139.268,49.251 ; 139.268,49.174 139.268,49.251 ; U8.1 139.268,49.251
NetU4_1: U4.1 U5.4 | length 39.5
  Top Layer w0.254: U5.4 139.714,106.948 140.575,106.948 141.275,106.248 141.275,96.317 142.138,95.453 164.744,95.453 165.684,96.393 U4.1
NetU4_3: U4.3 U6.4 | length 20.7
  Top Layer w0.254: U6.4 156.556,105.42 160.401,101.575 160.401,97.765 U4.3
PA0: U2.14 U3.4 | length 30.9
  Top Layer w0.254: U3.4 119.55,106.063 119.939,106.451 124.384,106.451 126.111,104.724 v2@126.111,102.26 ; U2.14 125.537,83.703 126.289,84.455 126.289,98.527 v2(126.314,98.552)
  Bottom Layer w0.254: v2@126.111,102.26 126.111,99.593 126.111,98.755 v2(126.314,98.552)
  other v2: 126.187,102.819
PA1: R39.1 U2.15 U9.10 | length 73.4
  Top Layer w0.254: R39.1 70.383,99.048 U9.10 ; v1(82.017,94.793) 86.766,94.793 87.271,95.298 123.6,95.298 124.104,94.793 124.104,86.182 122.758,84.836 122.758,84.226 122.781,84.203 U2.15
  Bottom Layer w0.254: v1(70.409,95.098) 70.434,95.098 71.526,94.005 81.458,94.005 82.017,94.564 v1(82.017,94.793)
PA2: R40.1 U2.16 U9.12 | length 70.2
  Top Layer w0.254: R40.1 72.983,99.108 U9.12 ; v1(79.096,94.894) 79.248,95.047 79.299,94.996 80.594,94.996 81.35,95.752 124.238,95.752 125.476,94.513 125.476,84.912 125.267,84.703 U2.16
  Bottom Layer w0.254: v1(73.076,95.275) 73.457,94.894 v1(79.096,94.894)
PA3: R41.1 U2.17 U9.14 | length 67.2
  Top Layer w0.254: U9.14 U9.14@75.582,99.133 ; R41.1 U9.14@75.582,99.133 ; v1(75.59,96.596) 75.59,99.125 U9.14@75.582,99.133 ; v1(79.756,96.596) 79.804,96.644 121.282,96.644 v2(122.098,97.46) v2@121.835,97.723 ; v2(122.377,94.107) 123.19,93.294 123.19,90.571 122.408,89.789 U2.17
  Bottom Layer w0.254: v1(75.59,96.596) v1(79.756,96.596) ; v2(122.098,97.46) 122.098,95.453 122.377,95.174 v2(122.377,94.107)
PA4: R42.1 U2.20 U9.16 | length 61.7
  Top Layer w0.254: R42.1 78.105,93.512 U9.16 79.59,99.15 81.356,97.384 86.614,97.384 87.452,98.222 119.659,98.222 v2(120.294,98.857) ; v2(120.447,94.336) 120.908,93.874 U2.20
  Bottom Layer w0.254: v2(120.447,94.336) v2@120.447,98.704
PA5: R45.1 U2.21 U10.4 | length 54.5
  Top Layer w0.254: R45.1 84.876,93.435 v1(85.09,93.65) 85.192,93.548 87.173,93.548 88.113,94.488 118.008,94.488 118.11,94.488 120.408,92.19 U2.21 ; U10.4 85.75,99.289 v1(86.106,98.933)
  Bottom Layer w0.254: v1(85.09,93.65) 85.09,97.485 86.106,98.501 v1(86.106,98.933)
PA6: U2.22
PA7: U2.23
PA8: U2.41
PA9: U2.42
PA10: U2.43
PA11: U2.44
PA12: U2.45
PA13: J8.2 U2.46 | length 25.3
  Top Layer w0.254: J8.2 110.465,58.166 111.811,59.512 114.249,61.951 114.249,76.581 114.757,77.089 114.757,77.724 114.278,78.203 U2.46
PA14: J8.3 U2.49 | length 20.1
  Top Layer w0.254: J8.3 113.005,60.064 114.908,61.968 U2.49
PA15: U2.50
PB3: R1.1 U2.55 | length 90
  Top Layer w0.203: R1.1 66.802,40.005 68.428,41.631 73.536,41.631 73.965,42.059 80.264,42.059 81.367,43.163 91.508,43.163 92.313,43.967 v1(96.342,43.967) ; v1(111.176,43.663) 114.656,43.663 115.519,42.799 117.424,42.799 117.908,43.283 117.908,63.348 U2.55
  Bottom Layer w0.203: v1(96.342,43.967) 97.46,42.85 109.957,42.85 110.769,43.663 v1(111.176,43.663)
PB4: R2.1 U2.56 | length 83.9
  Top Layer w0.254: R2.1 72.517,40.005 74.143,41.631 81.229,41.631 81.915,42.316 85.319,42.316 85.649,42.647 92.126,42.647 v1(92.177,42.697) ; v1(113.462,42.799) 114.325,42.799 115.011,42.113 117.78,42.113 118.408,42.742 U2.56
  Bottom Layer w0.254: v1(92.177,42.697) 93.193,42.697 93.777,43.282 95.733,43.282 96.647,42.367 110.16,42.367 110.541,42.748 112.954,42.748 113.208,42.494 113.462,42.748 v1(113.462,42.799)
PB5: R3.1 U2.57 | length 76.9
  Top Layer w0.254: R3.1 81.153,40.005 82.677,41.529 85.623,41.529 85.928,41.834 v1(93.777,41.834) ; v1(111.862,41.732) 114.376,41.732 114.579,41.529 118.161,41.529 118.908,42.277 118.908,62.636 U2.57
  Bottom Layer w0.254: v1(93.777,41.834) 93.828,41.783 94.463,41.783 94.945,42.266 95.91,42.266 96.444,41.732 v1(111.862,41.732)
PB6: R4.1 U2.58 | length 70.9
  Top Layer w0.254: R4.1 85.852,40.005 86.843,40.996 v1(95.58,40.996) ; v1(113.157,40.818) 113.309,40.665 113.411,40.767 118.923,40.767 119.408,41.253 119.408,62.357 U2.58
  Bottom Layer w0.254: v1(95.58,40.996) 95.529,40.996 95.707,40.818 v1(113.157,40.818)
PB11: R26.1 R34.2 U2.30 | length 67.6
  Top Layer w0.254: R26.1 98.544,54.161 105.224,47.481 R34.2 ; v1(99.644,61.976) 99.492,62.128 99.492,63.449 100.228,64.186 100.228,83.464 102.057,85.293 109.576,85.293 110.541,86.258 110.541,87.859 112.674,89.992 114.757,89.992 115.908,88.841 U2.30
  Bottom Layer w0.254: v1(98.476,54.178) 100.457,56.159 100.457,59.461 99.644,60.274 v1(99.644,61.976)
PB12: R31.1 R35.2 U2.33 | length 57.2
  Top Layer w0.254: R31.1 98.662,52.239 101.575,49.327 101.575,45.398 R35.2 ; v1(100.559,62.865) 100.533,62.865 100.863,63.195 100.863,83.21 102.356,84.703 U2.33
  Bottom Layer w0.254: v1(98.628,52.349) 98.679,52.299 99.847,52.299 100.914,53.365 100.914,60.909 100.559,61.265 v1(100.559,62.865)
PB13: R32.1 R36.2 U2.34 | length 55.2
  Top Layer w0.254: R32.1 97.079,50.317 98.247,49.149 R36.2 ; v1(101.524,61.798) 101.524,82.933 102.794,84.203 U2.34
  Bottom Layer w0.254: v1(98.146,49.327) 98.247,49.428 99.974,49.428 101.524,50.978 v1(101.524,61.798)
PC0: R9.2 S1.1 U2.8 | length 74.6
  Top Layer w0.254: U2.8 127.16,80.703 129.311,82.855 129.311,85.649 130.327,86.665 180.391,86.665 181.458,87.732 188.3,87.732 188.397,87.635 188.397,93.375 S1.1
PC1: R8.2 S1.2 U2.9 | length 84.8
  Top Layer w0.254: U2.9 127,81.203 128.857,83.061 128.857,85.837 130.139,87.119 179.575,87.119 180.823,88.367 184.658,88.367 186.08,89.789 186.08,94.285 187.706,95.91 190.068,95.91 190.877,95.102 S1.2 R8.2@190.877,87.671
PC2: R6.2 S1.3 U2.10 | length 86.7
  Top Layer w0.254: U2.10 126.858,81.703 128.403,83.249 128.403,86.025 129.951,87.573 179.038,87.573 180.34,88.875 184.226,88.875 185.445,90.094 185.471,90.094 185.471,94.666 187.274,96.469 190.382,96.469 S1.3 R6.2@193.417,87.648
PC3: R5.2 S1.4 U2.11 | length 89.2
  Top Layer w0.254: U2.11 126.603,82.203 127.949,83.55 127.949,86.213 129.763,88.027 178.629,88.027 180.111,89.51 183.972,89.51 185.014,90.551 185.014,94.92 187.017,96.923 192.468,96.923 S1.4 195.957,87.645 R5.2@195.947,87.635
PC4: R28.1 U2.24 U8.10 | length 83.2
  Top Layer w0.203: v1(115.392,79.807) 116.459,79.807 117.704,81.051 117.704,83.947 118.908,85.152 U2.24 ; v1(125.781,62.332) 125.959,62.332 126.644,63.017 145.39,63.017 146.888,61.519 146.888,60.198 ; U8.10 146.888,60.198 ; R28.1 153.159,59.896 152.806,60.249 146.939,60.249 146.888,60.198
  Bottom Layer w0.203: v1(115.392,79.807) 114.224,79.807 113.462,80.569 109.423,80.569 108.509,79.654 108.509,72.692 109.652,71.549 121.615,71.549 122.961,70.202 122.961,65.151 v1(125.781,62.332)
PC5: R27.1 U2.25 U8.12 | length 84.5
  Top Layer w0.203: v1(115.545,81.051) 116.589,81.051 117.3,81.763 117.3,84.28 118.408,85.388 U2.25 ; v1(123.419,62.433) 124.322,61.53 126.757,61.53 127.635,62.408 143.256,62.408 144.348,61.316 U8.12 144.348,55.061 145.085,54.324 150.108,54.324 152.239,56.456 R27.1
  Bottom Layer w0.203: v1(115.545,81.051) 109.245,81.051 107.925,79.731 107.925,72.593 109.372,71.145 121.285,71.145 122.298,70.133 122.298,64.113 123.419,62.992 v1(123.419,62.433)
PC6: R38.1 U2.37 U8.14 | length 80.4
  Top Layer w0.203: v1(108.941,83.058) 109.245,83.058 109.626,83.439 111.125,83.439 111.861,82.703 U2.37 ; v1(120.472,63.017) 121.539,63.017 123.596,60.96 127.203,60.96 128.168,61.925 140.97,61.925 141.808,61.087 U8.14 141.808,54.889 142.777,53.921 151.101,53.921 151.799,54.618 R38.1
  Bottom Layer w0.203: v1(108.941,83.058) 108.941,82.864 106.959,80.883 106.959,71.755 106.934,71.73 108.509,70.155 120.65,70.155 121.488,69.317 121.488,63.856 120.574,62.941 120.498,63.017 v1(120.472,63.017)
PC7: R37.1 U2.38 U8.16 | length 80.2
  Top Layer w0.203: v1(110.642,82.194) 110.651,82.203 U2.38 ; v1(121.412,61.646) 122.896,60.161 127.878,60.161 129.184,61.468 138.303,61.468 139.268,60.503 U8.16 139.268,54 139.751,53.518 150.724,53.518 151.511,52.73 153.108,52.73 R37.1
  Bottom Layer w0.203: v1(110.642,82.194) 108.941,82.194 107.521,80.775 107.521,72.133 108.991,70.663 120.625,70.663 120.729,70.558 120.817,70.558 121.891,69.484 121.891,63.96 ; v1(121.412,61.646) 121.891,62.125 121.891,63.96 ; 121.895,62.408 121.895,63.957 121.891,63.96
PC8: U2.39
PC9: U2.40
PC10: U2.51
PC11: U2.52
PC12: U2.53
PC13: U2.2
PC14: C10.2 U2.3 Y2.2 | length 19.5
  Top Layer w0.254: U2.3 127.765,78.203 129.362,76.606 129.362,69.774 130.578,68.558 Y2.2 C10.2@133.079,65.941
PC15: C11.2 U2.4 Y2.1 | length 16.9
  Top Layer w0.254: U2.4 128.459,78.703 129.845,77.318 129.845,72.568 130.937,71.476 132.897,71.476 Y2.1 133.079,73.683 C11.2
PD2: U2.54
RED: R10.1 U2.59 U15.1 | length 63.9
  Top Layer w0.203: U2.59 119.908,64.897 121.251,63.554 157.782,63.554 162.331,59.004 163.093,59.004 163.805,58.293 U15.1 163.805,51.576 R10.1
REJECT: R21.1 U2.28 | length 111.3
  Top Layer w0.254: v1(116.307,92.634) 116.18,92.634 115.57,92.024 115.57,91.262 116.908,89.924 U2.28 ; v1(128.854,91.338) 129.692,91.338 133.147,94.793 175.565,94.793 177.648,96.876 v1(177.648,103.175) ; v1(180.289,103.175) 198.45,103.175 201.219,100.406 R21.1
  Bottom Layer w0.254: v1(116.307,92.634) 116.332,92.659 119.278,92.659 120.599,91.338 v1(128.854,91.338) ; v1(177.648,103.175) v1(180.289,103.175)
TRIG1: U2.26 U5.1 U5.2 | length 39
  Top Layer w0.254: U2.26 117.908,88.343 118.44,88.875 119.355,88.875 v2(119.405,88.925) ; v2(127.432,88.798) 127.432,93.802 128.372,94.742 128.372,98.73 128.676,99.035 137.236,99.035 138.481,100.279 138.43,100.33 138.43,102.641 ; U5.2 139.064,102.792 138.913,102.641 138.43,102.641 ; 138.43,102.641 138.43,102.692 ; 138.43,102.692 138.414,102.709 U5.1 138.43,103.753 138.43,102.692
  Bottom Layer w0.254: v2(119.405,88.925) 127.305,88.925 v2(127.432,88.798)
TRIG1+: J4.2 R13.1 | length 4.9
  Top Layer w0.254: J4.2 144.23,112.945 R13.1
TRIG1-: J4.3 U4.2 | length 35.9
  Top Layer w0.254: J4.3 147,113.045 148.717,111.328 161.747,111.328 v1(161.925,111.506) ; U4.2 U4.2@163.294,97.711
  Bottom Layer w0.254: v1(161.925,111.506) 161.925,110.848 160.909,109.832 160.909,99.797 U4.2
TRIG2: U2.27 U6.1 U6.2 | length 45.2
  Top Layer w0.254: U2.27 117.408,90.535 v2(117.653,90.78) ; v1(129.819,90.297) 130.302,90.297 133.985,93.98 143.231,93.98 143.815,93.396 v1(144.272,93.396) ; v1(144.094,97.663) 144.12,97.688 144.12,102.413 ; U6.1 144.12,103.664 144.12,102.413 ; U6.2 144.764,102.574 144.551,102.362 144.17,102.362 144.12,102.413
  Bottom Layer w0.254: v2(117.653,90.78) 119.405,90.78 119.888,90.297 v1(129.819,90.297) ; v1(144.094,97.663) 144.272,97.485 v1(144.272,93.396)
TRIG2+: J5.2 R14.1 | length 4.9
  Top Layer w0.254: J5.2 178.93,112.662 R14.1
TRIG2-: J5.3 U4.4 | length 39.8
  Bottom Layer w0.254: U4.4 160.3,99.797 160.3,113.386 162.001,115.087 179.307,115.087 J5.3
TRIG_INPUT: J3.3 R7.1 U3.2 | length 22.6
  Top Layer w0.254: U3.2 118.9,106.581 120.98,108.661 120.98,111.76 120.54,112.2 R7.1
  Top Layer w0.5: J3.3@115.5,120.7 115.5,116.021 115.875,115.646 118.542,115.646 119.2,114.988 R7.1
YELLOW: R25.1 U2.62 U15.5 | length 72.6
  Top Layer w0.203: U2.62 121.408,65.459 122.403,64.465 158.394,64.465 162.56,60.3 172.644,60.3 173.965,58.979 U15.5 173.965,51.627 R25.1
pads on no net: BT1.0 J1.0 J4.4 J4.5 J4.7 J4.8 J4.9 J5.4 J5.5 J5.7 J5.8 J5.9 S2.3 S2.4 U2.35 U2.36 U3.1 U4.5 U4.6 U4.8 U4.9 U4.10 U4.11 U4.12 U4.13 U15.8 U15.9 U15.10 U15.11 U15.12 U15.13

## Polygon pours and split planes (outlines as drawn)
GND on Top Layer "Top Layer-No Net" (solid, remove dead copper, pour order 2): 30,129.9 30.1,130 210,130 210,30 30,30
GND on Bottom Layer "Top Layer-No Net" (solid, remove dead copper, pour order 4): 30.1,130 210,130 210,30 30.2,30 30.1,30.1

## Keep-outs
Keep-Out Layer:
  lines w0.1: 30,129.9 30.1,130 ; 30.1,130 30.1,30.1 30,30 210,30 210,130 30.1,130

## Silkscreen, mask and mechanical layers (free items; w line width, h text height)
Top Overlay:
  text "HOST-IO" at 62.662,120.447 h1 r90
  text "POWER" at 45.923,120.193 h1 r90
  text "FIBER" at 100.559,119.812 h1 r90
  text "CAMERA1" at 130.505,118.669 h1 r90
  text "CAMERA2" at 165.608,118.542 h1 r90
  text "1" at 69.748,118.008 h0.8
  text "1" at 106.502,118.008 h0.8
  text "4" at 118.974,117.856 h0.8
  text "6" at 87.63,117.729 h0.8
  text "FD2000" at 167.386,76.733 h1.5
  text "2014 12.22" at 167.259,73.965 h1.5
  text "4" at 116.002,57.455 h0.8
  text "1" at 105.766,55.778 h0.8
  text "LAMP" at 157.683,42.291 h1 r90
  text "BOTTON" at 125.476,42.164 h1 r90
  text "REJECT" at 184.861,42.164 h1 r90
  text "2" at 188.341,40.589 h0.8
  text "1" at 194.767,40.589 h0.8
  text "6" at 97.587,40.005 h1
  text "4" at 163.068,40.005 h1
  text "1" at 174.142,40.005 h1
  text "1" at 115.722,39.878 h1
  text "6" at 129.718,39.878 h1
  text "1" at 148.539,39.726 h1
  text "RELAY" at 90.348,36.881 h1 r90
  text "POWER" at 64.948,0 h1 r90
Mechanical 1:
  the board outline again, w0.1

## Dimensions
79,137 to 52,138 on Mechanical 13
114,138 to 79,136 on Mechanical 13
147,136.746 to 114,135 on Mechanical 13
182,139 to 147,137 on Mechanical 13
210,137 to 182,136 on Mechanical 13
30,137 to 35,132 on Mechanical 13
30,24 to 210,24 on Mechanical 13
213,130 to 217,30 on Mechanical 13

## Text inside footprints (layer, text, board x,y; h text height)
BT1: Top Overlay "+" at 88.963,79.46 h0.8 r90; Top Overlay "-" at 88.363,61.76 h0.8 r90
C2: Top Overlay "+" at 36.088,84.125 h0.8 r90
C12: Top Overlay "+" at 72.042,44.988 h0.8
C15: Top Overlay "+" at 71.171,45.695 h0.8 r180
C20: Top Overlay "+" at 109.499,74.981 h0.8 r180
C28: Top Overlay "+" at 52.149,101.298 h0.8 r180
J4: Top Overlay "6" at 142.345,123.725 h1.5; Top Overlay "9" at 150.655,123.725 h1.5; Top Overlay "5" at 152.04,114.325 h1.5; Top Overlay "1" at 141.21,114.325 h1.5
J5: Top Overlay "6" at 177.045,123.425 h1.5; Top Overlay "9" at 185.355,123.425 h1.5; Top Overlay "5" at 186.74,114.025 h1.5; Top Overlay "1" at 175.91,114.025 h1.5